# Altium PCB Main (André Seidel Oliveira's conflicted copy 2013-01-27).PcbDoc
Units mil, origin at the board's own origin, x right, y up, seen from the top; angles counter-clockwise.
Board outline 7637.8 x 5309.29 mil, 2 copper layers (Top Layer, Bottom Layer), stack 65.792 mil thick; 18 components, 54 nets, 227 pads, 2 vias.
Unrouted connection lines stored in the file: 51.
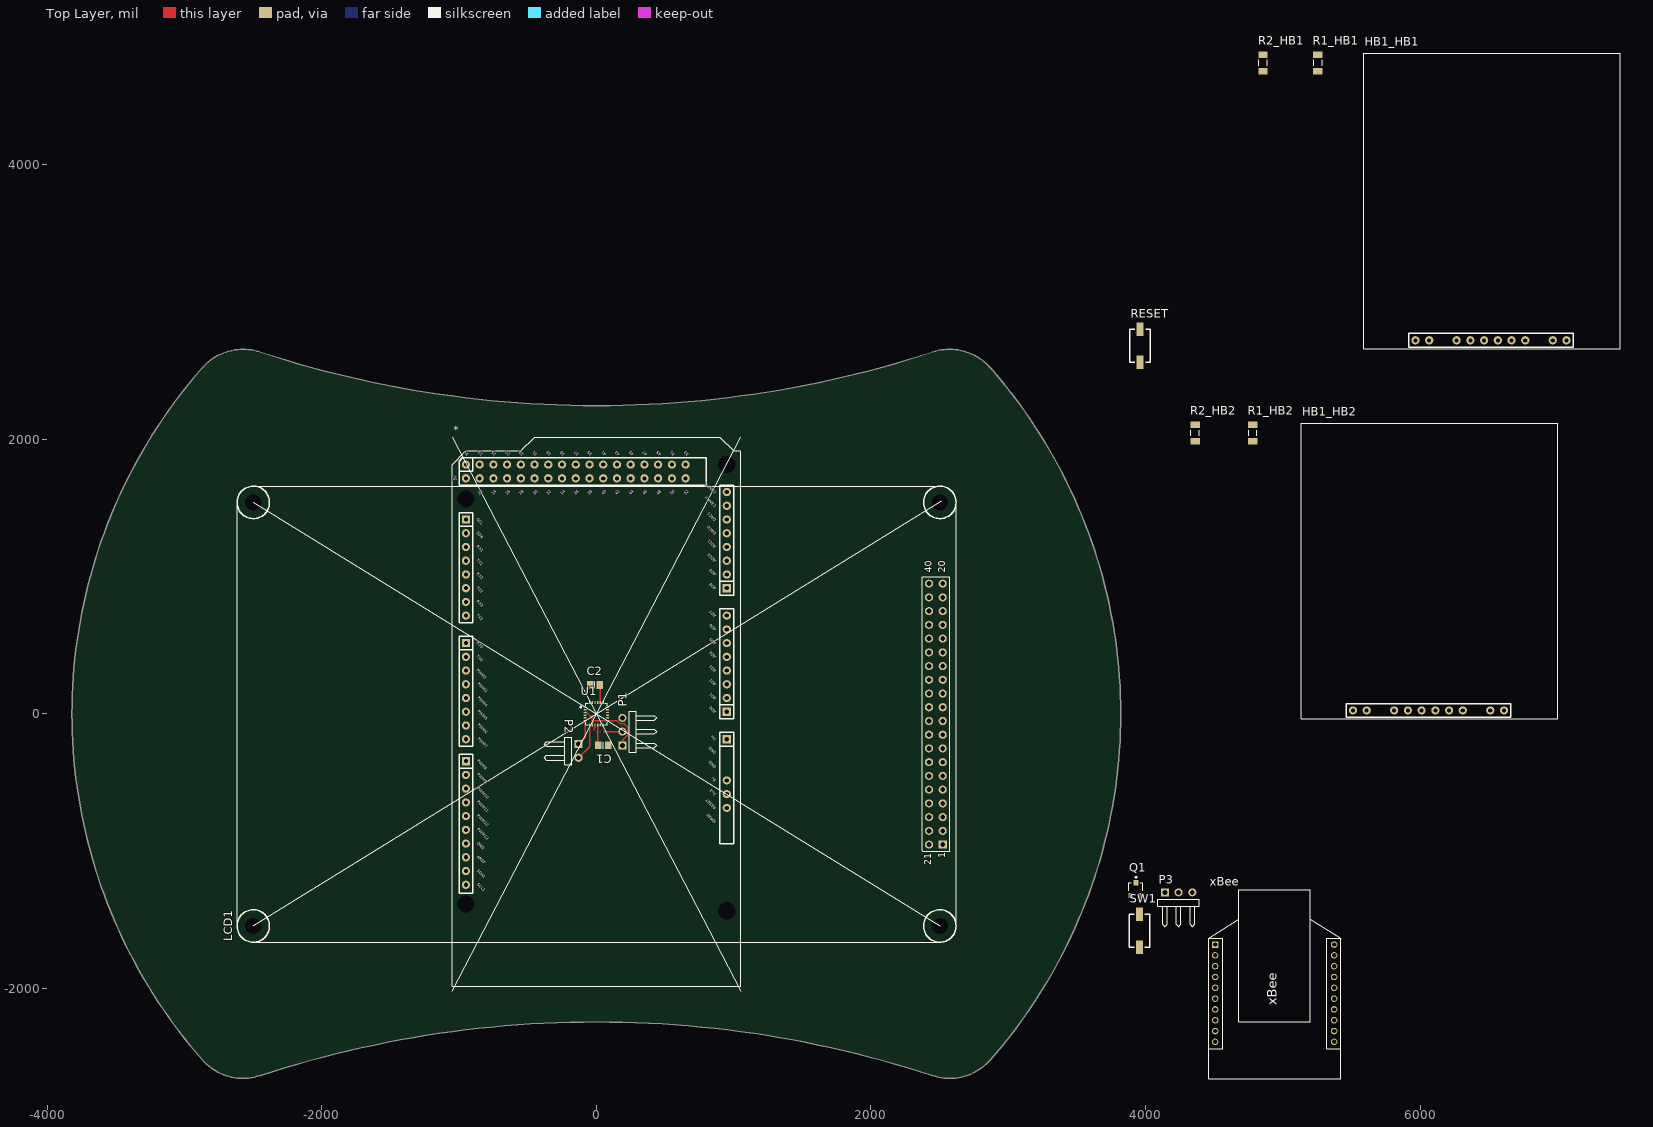
[diagram p0: Top Layer view]
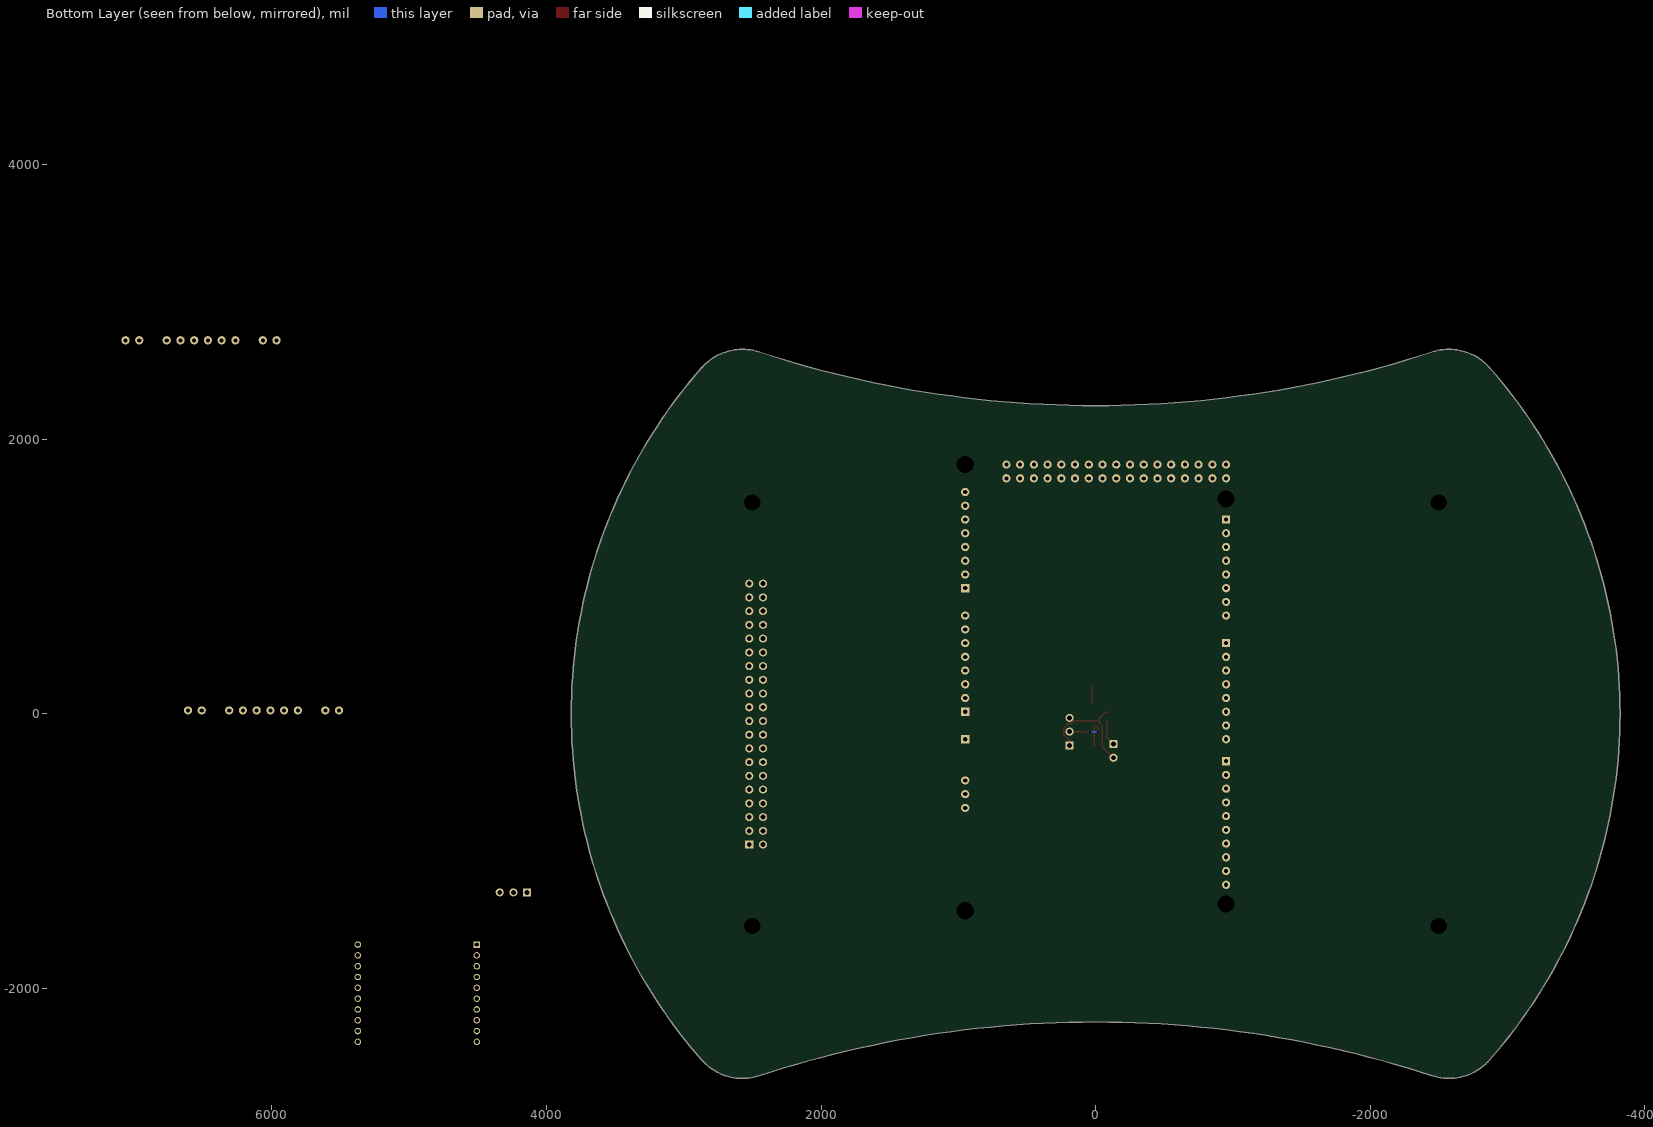
[diagram p1: Bottom Layer view, seen from below]

## Layer stack, top to bottom
Top Layer: signal copper 1.4
Dielectric: core 62.9921, FR-4, Dk 4.8
Bottom Layer: signal copper 1.4

## Board outline
-2868.7,-2520.82 ccw(c-2572.96,-2260.95) -2450.43,-2635.1 cw(c0,-10118.11) 2450.43,-2635.1 ccw(c2572.96,-2260.95) 2868.7,-2520.82 ccw(c0,0) 2868.7,2520.82 ccw(c2572.96,2260.95) 2450.43,2635.1 cw(c0,10118.11) -2450.43,2635.1 ccw(c-2572.96,2260.95) -2868.7,2520.82 ccw(c0,0)

## Design rules (kind name [scope] priority, off if disabled: settings)
Clearance [All] p1: gap=8
HoleSize [All] p1: absolutevalues=TRUE maxlimit=250 minlimit=12 maxpercent=80.000 minpercent=20.000
MinimumAnnularRing [All] p1: minimumring=6
MinimumSolderMaskSliver [All] p1 off: minsoldermaskwidth=0
PolygonConnect [All] p1: connectstyle=Relief reliefconductorwidth=10 reliefentries=4 polygonreliefangle="90 Angle"
RoomDefinition IMU [InComponentClass('IMU')] p1: confinementstyle=ConfineIn formatcopy=TRUE lockcomponents=TRUE outline -400,-390 450,-390 450,360 -400,360
RoomDefinition HB2 [InComponentClass('HB2')] p2: confinementstyle=ConfineIn formatcopy=TRUE lockcomponents=FALSE outline 4300,-54.96 7020,-54.96 7020,2265.04 4300,2265.04
RoomDefinition HB1 [InComponentClass('HB1')] p3: confinementstyle=ConfineIn formatcopy=TRUE lockcomponents=FALSE outline 4795,2640.04 7475,2640.04 7475,4960.04 4795,4960.04
RoomDefinition Bluetooth [InComponentClass('Bluetooth')] p4: confinementstyle=ConfineIn formatcopy=TRUE lockcomponents=FALSE outline 3860,-2680 5440,-2680 5440,-1160 3860,-1160
RoutingVias [All] p1: holewidth=16 width=19 viastyle="Through Hole" minholewidth=12 minwidth=16 maxholewidth=16 maxwidth=19
SilkToSilkClearance [All] p1 off: silktosilkclearance=0
SilkscreenOverComponentPads [All] p1: minsilkscreentomaskgap=1
SolderMaskExpansion [All] p1: expansion=4
Width VCC's [(InNet('+3V3') OR InNet('+5V') OR InNet('USBVCC') OR InNet('USBVCCU2'))] p1: maxlimit=30 minlimit=12 preferedwidth=30
Width [All] p2: maxlimit=20 minlimit=8 preferedwidth=8
24 further rules are at their usual default settings.

## Classes and differential pairs
channel class "H Bridge": Designator1 Designator2
component class Bluetooth: P3 Q1 SW1 xBee
component class IMU: C1 C2 P1 P2 U1
component class Core: * "Arduino DUE" RESET
component class LCD: LCD1
net class DB[0..15]: DB0 DB1 DB2 DB3 DB4 DB5 DB6 DB7 DB8 DB9 DB10 DB11 DB12 DB13 DB14 DB15
component class HB1: HB1_HB1 R1_HB1 R2_HB1
component class HB2: HB1_HB2 R1_HB2 R2_HB2

## Components (designator, comment, footprint, x,y, rotation, side; value= is the part's Value field where it differs from the comment)
* "ARDUINO DUE" ARDUINO-DUE 1050,-1985 r90 top locked
C1 "Cap Semi" 6-0805_N 50,-230 r180 top
C2 "Cap Semi" 6-0805_N -10,210 r0 top
HB1_HB1 "H BRIDGE" POLOLU-QIK-2S12V10-BOTTOM 7455,2660.04 r90 top (schematic designator HB1)
HB1_HB2 "H BRIDGE" POLOLU-QIK-2S12V10-BOTTOM 7000,-34.96 r90 top (schematic designator HB1)
LCD1 "5.0\" LCD" "TFT LCD 5.0 INCHES" 2619.46,1657.75 r180 top
P1 "Header 3H" HDR1X3H 190,-230 r90 top
P2 "Header 2H" HDR1X2H -130,-220 r270 top
P3 "Header 3H" HDR1X3H 4140,-1300 r0 top
Q1 "BSS138" SOT23 3929.12,-1276.46 r0 top
R1_HB1 "10K" RES1206 5255,4740.04 r90 top (schematic designator R1)
R1_HB2 "10K" RES1206 4780,2045.04 r90 top (schematic designator R1)
R2_HB1 "10K" RES1206 4855,4740.04 r90 top (schematic designator R2)
R2_HB2 "10K" RES1206 4360,2045.04 r90 top (schematic designator R2)
RESET "PUSH BUTTON" "PUSH-BUTTON 5,2X1,6MM" 3960,2560 r90 top
SW1 "RESET xBee" "PUSH-BUTTON 5,2X1,6MM" 3955,-1700 r90 top
U1 "MPU-9150" LGA-24 0,0 r0 top
xBee "xBee" xBee 5420,-2460 r90 top

## Footprints (in the part's own frame and the unit in brackets; to place one, negate y for a bottom-side part, rotate by r counter-clockwise, add the part's x,y. Pads: shape width x height; smd on the part's side, far side on the other; paste and mask are expansions set on the pad)
6-0805_N [mm] "Chip Resistor, Body 2.0x1.2mm, IPC Medium Density"
  rect 1.2x1.4 smd: 1(-0.9,0) 2(0.9,0)
  silkscreen extent 0,-0.6 0,0.6, body extent -1.07,-0.7 1.07,0.7, height 0.7
ARDUINO-DUE [mil]
  round 62.99 hole 125.98: 0(550,100) 0(600,2000) 0(3550,2000) 0(3800,100)
  rect 60x60 hole 30: 0(2500,2000) 8(1640,2000) 21(3400,2000) A0(2000,100) A8(2900,100) VIN(1800,100)
  round 60 hole 30: 1(2400,2000) 2(2300,2000) 3(2200,2000) 3V3(1400,100) 4(2100,2000) 5(2000,2000) 5V(1500,100) 5V(3700,2000) 5V(3800,2000) 6(1900,2000) 7(1800,2000) 9(1540,2000) 10(1440,2000) 11(1340,2000) 12(1240,2000) 13(1140,2000) 14(2700,2000) 15(2800,2000) 16(2900,2000) 17(3000,2000) 18(3100,2000) 19(3200,2000) 20(3300,2000) 22(3700,1900) 23(3800,1900) 24(3700,1800) 25(3800,1800) 26(3700,1700) 27(3800,1700) 28(3700,1600) 29(3800,1600) 30(3700,1500) 31(3800,1500) 32(3700,1400) 33(3800,1400) 34(3700,1300) 35(3800,1300) 36(3700,1200) 37(3800,1200) 38(3700,1100) 39(3800,1100) 40(3700,1000) 41(3800,1000) 42(3700,900) 43(3800,900) 44(3700,800) 45(3800,800) 46(3700,700) 47(3800,700) 48(3700,600) 49(3800,600) 50(3700,500) 51(3800,500) 52(3700,400) 53(3800,400) A1(2100,100) A2(2200,100) A3(2300,100) A4(2400,100) A5(2500,100) A6(2600,100) A7(2700,100) A9(3000,100) A10(3100,100) A11(3200,100) AREF(940,2000) CANRX(3500,100) CANTX(3600,100) DAC0(3300,100) DAC1(3400,100) GND1(1040,2000) RESET(1300,100) SCL1(740,2000) SDA1(840,2000)
  silkscreen extent 0,0 4000,2100, body extent -35,0 4000,2100, height 441
HDR1X2H [mm] "Connector; Header; 2 Position; Right Angle"
  rect 1.5x1.5 hole 0.9: 1(0,0)
  round 1.5 hole 0.9: 2(2.54,0)
  silkscreen extent -1.27,-6.35 3.81,-1.27
HDR1X3H [mm] "Connector; Header; 3 Position; Right Angle"
  rect 1.5x1.5 hole 0.9: 1(0,0)
  round 1.5 hole 0.9: 2(2.54,0) 3(5.08,0)
  silkscreen extent -1.27,-6.35 6.35,-1.27
LGA-24 [mm] "QFN, 24-Leads, Body 4,0x4,0mm (max), Pitch 0,50mm, IPC Medium Density"
  oval 0.55x0.25 smd: 1(-2.075,1.25) 2(-2.075,0.75) 3(-2.075,0.25) 4(-2.075,-0.25) 5(-2.075,-0.75) 6(-2.075,-1.25) 13(2.075,-1.25) 14(2.075,-0.75) 15(2.075,-0.25) 16(2.075,0.25) 17(2.075,0.75) 18(2.075,1.25)
  oval 0.25x0.55 smd: 7(-1.25,-2.075) 8(-0.75,-2.075) 9(-0.25,-2.075) 10(0.25,-2.075) 11(0.75,-2.075) 12(1.25,-2.075) 19(1.25,2.075) 20(0.75,2.075) 21(0.25,2.075) 22(-0.25,2.075) 23(-0.75,2.075) 24(-1.25,2.075)
  silkscreen extent -3.02,-2 2,2, body extent -2,-2 2,2, height 1.1
POLOLU-QIK-2S12V10-BOTTOM [mil] "Pololu H Bridge"
  round 47.24 hole 118.11 unplated: 0(130,1730) 0(130,130) 0(2020,130) 0(2020,1730)
  round 60 hole 30: 5V(60,790) ERR(60,1190) GND1(60,1390) GND2(60,690) GND3(60,390) RST(60,1090) RX(60,890) SIN(60,490) TX(60,990) VIN(60,1490)
  silkscreen extent 0,0 2150,1866, body extent 0,0 2165,1870, height 437
"PUSH-BUTTON 5,2X1,6MM" [mm]
  rect 2.54x1.27 smd: 1(0,0) 2(6.1,0)
  silkscreen extent 0,-1.9 6.1,1.9, body extent -0.3,-1.7 6.5,1.7, height 2.5
RES1206 [mm] "Chip Resistor, 2-Leads, Body 3,1x1,6mm, IPC Medium Density"
  rect 1.15x1.75 smd: 1(-1.525,0) 2(1.525,0)
  silkscreen extent -0.55,-0.78 0.55,0.78, body extent -1.6,-0.8 1.6,0.8, height 0.55
SOT23 [mm] "SOT-23; 3 Leads; Body 3.1 x 2.5 mm, inc. leads (LxW max), Alternate Lead Configuration"
  rect 0.9x0.95 smd: 1(0,1.175) 2(0.95,-1.175) 3(-0.95,-1.175)
  silkscreen extent -1.3,-0.3 1.3,2.32
"TFT LCD 5.0 INCHES" [mm]
  round 1.2 hole 3 unplated: 0(3,81.35) 0(3,3) 0(130,3) 0(130,81.35)
  rect 1.5x1.5 hole 0.9: 1(2.464,66.294)
  round 1.5 hole 0.9: 2(2.464,63.754) 3(2.464,61.214) 4(2.464,58.674) 5(2.464,56.134) 6(2.464,53.594) 7(2.464,51.054) 8(2.464,48.514) 9(2.464,45.974) 10(2.464,43.434) 11(2.464,40.894) 12(2.464,38.354) 13(2.464,35.814) 14(2.464,33.274) 15(2.464,30.734) 16(2.464,28.194) 17(2.464,25.654) 18(2.464,23.114) 19(2.464,20.574) 20(2.464,18.034) 21(5.004,66.294) 22(5.004,63.754) 23(5.004,61.214) 24(5.004,58.674) 25(5.004,56.134) 26(5.004,53.594) 27(5.004,51.054) 28(5.004,48.514) 29(5.004,45.974) 30(5.004,43.434) 31(5.004,40.894) 32(5.004,38.354) 33(5.004,35.814) 34(5.004,33.274) 35(5.004,30.734) 36(5.004,28.194) 37(5.004,25.654) 38(5.004,23.114) 39(5.004,20.574) 40(5.004,18.034)
  silkscreen extent 0,0 133,84.35, body extent 0,0 133,84.35, height 16.78
xBee [mm]
  rect 1.2x1.2 hole 0.8: 1(19.8,23.2)
  round 1.2 hole 0.8: 2(17.8,23.2) 3(15.8,23.2) 4(13.8,23.2) 5(11.8,23.2) 6(9.8,23.2) 7(7.8,23.2) 8(5.8,23.2) 9(3.8,23.2) 10(1.8,23.2) 11(1.8,1.2) 12(3.8,1.2) 13(5.8,1.2) 14(7.8,1.2) 15(9.8,1.2) 16(11.8,1.2) 17(13.8,1.2) 18(15.8,1.2) 19(17.8,1.2) 20(19.8,1.2)
  silkscreen extent -5,0 29.9,24.4, body extent -0.36,0 27.54,24.5, height 7.8

## Part data
C1 C2: "Capacitor (Semiconductor SIM Model)"
HB1_HB1 HB1_HB2: library part POLOLU-QIK-2S12V10, "POLOLU QIK 2S12V10 DUAL H BRIDGE"
LCD1: library part "TFT LCD 5.0 INCHES"
P1 P3: "Header, 3-Pin, Right Angle"
P2: "Header, 2-Pin, Right Angle"
Q1: "N-Channel Enhancement Mode Vertical DMOS FET"
R1_HB1 R1_HB2 R2_HB1 R2_HB2: library part RES
SW1: library part "PUSH BUTTON"
U1: "InveSense MPU-9150 IMU 9 axles"

## Via types
v1: diameter 19, hole 16, Top Layer to Bottom Layer, 2 vias

## Nets (pads, with @x,y where several pads share a name; then routed paths per layer and width w, separated by ;. In a path a pad name is that pad's centre, name@x,y a point inside that pad or via, vN(x,y) a via of type N, cw(c..) or ccw(c..) an arc to the next point about the centre after c; other vN are vias at no path point)
+3V3: LCD1.2 LCD1.6 P1.1 U1.3 U1.8 U1.13 xBee.1 | length 544.8
  Top Layer w12: U1.3@-80.93,9.08 -67.95,9.08 -30.29,-28.58 -30.29,-67.95 -29.53,-68.71 -10.03,-49.21 U1.13 147.65,-49.21 171.97,-73.53 203.53,-73.53 233.53,-103.53 233.53,-148.03 190,-191.56 P1.1
DB0: *.33 LCD1.21
DB1: *.34 LCD1.22
DB2: *.35 LCD1.23
DB3: *.36 LCD1.24
DB4: *.37 LCD1.25
DB5: *.38 LCD1.26
DB6: *.39 LCD1.27
DB7: *.40 LCD1.28
DB8: *.51 LCD1.7
DB9: *.50 LCD1.8
DB10: *.49 LCD1.9
DB11: *.48 LCD1.10
DB12: *.47 LCD1.11
DB13: *.46 LCD1.12
DB14: *.45 LCD1.13
DB15: *.44 LCD1.14
GND: C1.1 C2.1 LCD1.1 P1.3 P3.3 Q1.2 R2_HB1.1 R2_HB2.1 RESET.2 SW1.1 U1.1 U1.11 U1.15 U1.17 U1.18 xBee.10
LCD_CS: *.43 LCD1.15
LCD_RESET: *.32 LCD1.17
LCD_RS: *.41 LCD1.4
LCD_WR: *.42 LCD1.5
Net*_RESET: *.RESET RESET.1
Net*_VIN: *.VIN
NetC1_2: C1.2 U1.10 | length 150.4
  Top Layer w12: U1.10 10,-81.85 10,-103.28 9.84,-103.44 9.84,-225.28 C1.2
NetC2_2: C2.2 U1.20 | length 124.2
  Top Layer w12: U1.20 C2.2@29.53,205.91
NetHB1_HB1_ERR: HB1_HB1.ERR
NetHB1_HB1_GND1: HB1_HB1.GND1
NetHB1_HB1_RST: HB1_HB1.RST
NetHB1_HB1_RX: HB1_HB1.RX
NetHB1_HB1_TX: HB1_HB1.TX R1_HB1.2
NetHB1_HB2_ERR: HB1_HB2.ERR
NetHB1_HB2_GND1: HB1_HB2.GND1
NetHB1_HB2_RST: HB1_HB2.RST
NetHB1_HB2_RX: HB1_HB2.RX
NetHB1_HB2_TX: HB1_HB2.TX R1_HB2.2
NetP1_2: P1.2 U1.9 | length 242
  Top Layer w12: v1(-15,-130) -15,-99.83 -10.17,-95 ; v1(40,-130) P1.2
  Bottom Layer w12: v1(-15,-130) v1(40,-130)
NetP2_1: P2.1 U1.6 | length 190.8
  Top Layer w12: P2.1 -81.69,-171.69 U1.6
NetP2_2: P2.2 U1.7 | length 271.8
  Top Layer w12: P2.2 -49.21,-239.21 U1.7
NetP3_2: P3.2 xBee.20
NetQ1_1: Q1.1 SW1.2 xBee.5
NetQ1_3: Q1.3
NetR1_HB1_1: R1_HB1.1 R2_HB1.2
NetR1_HB2_1: R1_HB2.1 R2_HB2.2
NetU1_12: U1.12
NetU1_23: U1.23
NetU1_24: U1.24
NetxBee_2: xBee.2
NetxBee_3: xBee.3
T_CLK: *.27 LCD1.29
T_CS: *.28 LCD1.30
T_DIN: *.29 LCD1.31
T_IRQ: *.31 LCD1.34
T_OUT: *.30 LCD1.33
pads on no net: *.0 *.1 *.2 *.3 *.3V3 *.4 *.5 *.5V *.6 *.7 *.8 *.9 *.10 *.11 *.12 *.13 *.14 *.15 *.16 *.17 *.18 *.19 *.20 *.21 *.22 *.23 *.24 *.25 *.26 *.52 *.53 *.A0 *.A1 *.A2 *.A3 *.A4 *.A5 *.A6 *.A7 *.A8 *.A9 *.A10 *.A11 *.AREF *.CANRX *.CANTX *.DAC0 *.DAC1 *.GND1 *.SCL1 *.SDA1 HB1_HB1.0 HB1_HB1.5V HB1_HB1.GND2 HB1_HB1.GND3 HB1_HB1.SIN HB1_HB1.VIN HB1_HB2.0 HB1_HB2.5V HB1_HB2.GND2 HB1_HB2.GND3 HB1_HB2.SIN HB1_HB2.VIN LCD1.0 LCD1.3 LCD1.16 LCD1.18 LCD1.19 LCD1.20 LCD1.32 LCD1.35 LCD1.36 LCD1.37 LCD1.38 LCD1.39 LCD1.40 P3.1 U1.2 U1.4 U1.5 U1.14 U1.16 U1.19 U1.21 U1.22 xBee.4 xBee.6 xBee.7 xBee.8 xBee.9 xBee.11 xBee.12 xBee.13 xBee.14 xBee.15 xBee.16 xBee.17 xBee.18 xBee.19

## Silkscreen, mask and mechanical layers (free items; w line width, h text height)
Top Overlay:
  lines w3.94: -2498.66,-1545 2514.46,1552.75 ; -2498.66,1539.64 2501.35,-1545 ; -1050,-2020 1050,2015 ; -1050,2015 1050,-2020
Mechanical 1:
  the board outline again, w5

## Text inside footprints (layer, text, board x,y; h text height)
*: Top Overlay "5V" at -1015,1699 h20 r90; Top Overlay "SCL1" at -870,-1245 h20 r315; Top Overlay "SDA1" at -870,-1145 h20 r315; Top Overlay "IOREF" at 875,-785 h20 r135; Top Overlay "AREF" at -870,-1045 h20 r315; Top Overlay "GND" at -870,-945 h20 r315; Top Overlay "PWM13" at -870,-845 h20 r315; Top Overlay "PWM12" at -870,-745 h20 r315; Top Overlay "PWM11" at -870,-645 h20 r315; Top Overlay "PWM10" at -870,-545 h20 r315; Top Overlay "PWM9" at -870,-445 h20 r315; Top Overlay "PWM8" at -870,-345 h20 r315; Top Overlay "PWM7" at -867.93,-185 h20 r315; Top Overlay "PWM6" at -867.93,-85 h20 r315; Top Overlay "PWM5" at -867.93,15 h20 r315; Top Overlay "PWM4" at -867.93,115 h20 r315; Top Overlay "PWM3" at -867.93,215 h20 r315; Top Overlay "PWM2" at -875,315 h20 r315; Top Overlay "TX0" at -875,415 h20 r315; Top Overlay "TX3" at -875,715 h20 r315; Top Overlay "RX3" at -875,815 h20 r315; Top Overlay "TX2" at -875,915 h20 r315; Top Overlay "RX2" at -875,1015 h20 r315; Top Overlay "TX1" at -875,1115 h20 r315; Top Overlay "RX1" at -875,1215 h20 r315; Top Overlay "SDA" at -875,1315 h20 r315; Top Overlay "53" at 675,1890 h20 r135; Top Overlay "51" at 575,1890 h20 r135; Top Overlay "49" at 475,1890 h20 r135; Top Overlay "47" at 375,1890 h20 r135; Top Overlay "45" at 275,1890 h20 r135; Top Overlay "43" at 175,1890 h20 r135; Top Overlay "41" at 75,1890 h20 r135; Top Overlay "39" at -25,1890 h20 r135; Top Overlay "37" at -125,1890 h20 r135; Top Overlay "35" at -225,1890 h20 r135; Top Overlay "33" at -325,1890 h20 r135; Top Overlay "31" at -425,1890 h20 r135; Top Overlay "29" at -525,1890 h20 r135; Top Overlay "27" at -625,1890 h20 r135; Top Overlay "25" at -725,1890 h20 r135; Top Overlay "23" at -825,1890 h20 r135; Top Overlay "5V" at -925,1890 h20 r135; Top Overlay "50" at 550,1590 h20 r45; Top Overlay "52" at 650,1590 h20 r45; Top Overlay "48" at 450,1590 h20 r45; Top Overlay "46" at 350,1590 h20 r45; Top Overlay "44" at 250,1590 h20 r45; Top Overlay "42" at 150,1590 h20 r45; Top Overlay "40" at 50,1590 h20 r45; Top Overlay "38" at -50,1590 h20 r45; Top Overlay "36" at -150,1590 h20 r45; Top Overlay "34" at -250,1590 h20 r45; Top Overlay "32" at -350,1590 h20 r45; Top Overlay "30" at -450,1590 h20 r45; Top Overlay "28" at -550,1590 h20 r45; Top Overlay "26" at -650,1590 h20 r45; Top Overlay "24" at -750,1590 h20 r45; Top Overlay "22" at -850,1590 h20 r45; Top Overlay "SCL" at -875,1415 h20 r315; Top Overlay "RX0" at -875,515 h20 r315; Top Overlay "CANTX" at 875,1615 h20 r135; Top Overlay "CANRX" at 875,1515 h20 r135; Top Overlay "DAC1" at 875,1415 h20 r135; Top Overlay "DAC0" at 875,1315 h20 r135; Top Overlay "AD11" at 875,1215 h20 r135; Top Overlay "AD10" at 875,1115 h20 r135; Top Overlay "AD9" at 875,1015 h20 r135; Top Overlay "AD8" at 875,915 h20 r135; Top Overlay "AD7" at 875,715 h20 r135; Top Overlay "AD6" at 875,615 h20 r135; Top Overlay "AD5" at 875,515 h20 r135; Top Overlay "AD4" at 875,415 h20 r135; Top Overlay "AD3" at 875,315 h20 r135; Top Overlay "AD2" at 875,215 h20 r135; Top Overlay "AD1" at 875,115 h20 r135; Top Overlay "AD0" at 875,15 h20 r135; Top Overlay "Vin" at 875,-185 h20 r135; Top Overlay "GND" at 875,-285 h20 r135; Top Overlay "GND" at 875,-385 h20 r135; Top Overlay "5v" at 875,-485 h20 r135; Top Overlay "3v3" at 875,-585 h20 r135; Top Overlay "RESET" at 875,-685 h20 r135
LCD1: Top Overlay "20" at 2542.45,1027.75 h50 r90; Top Overlay "40" at 2442.45,1027.75 h50 r90; Top Overlay "21" at 2439.86,-1101.5 h50 r90; Top Overlay "1" at 2542.45,-1052.25 h50 r90